# Allegro board CMS.brd
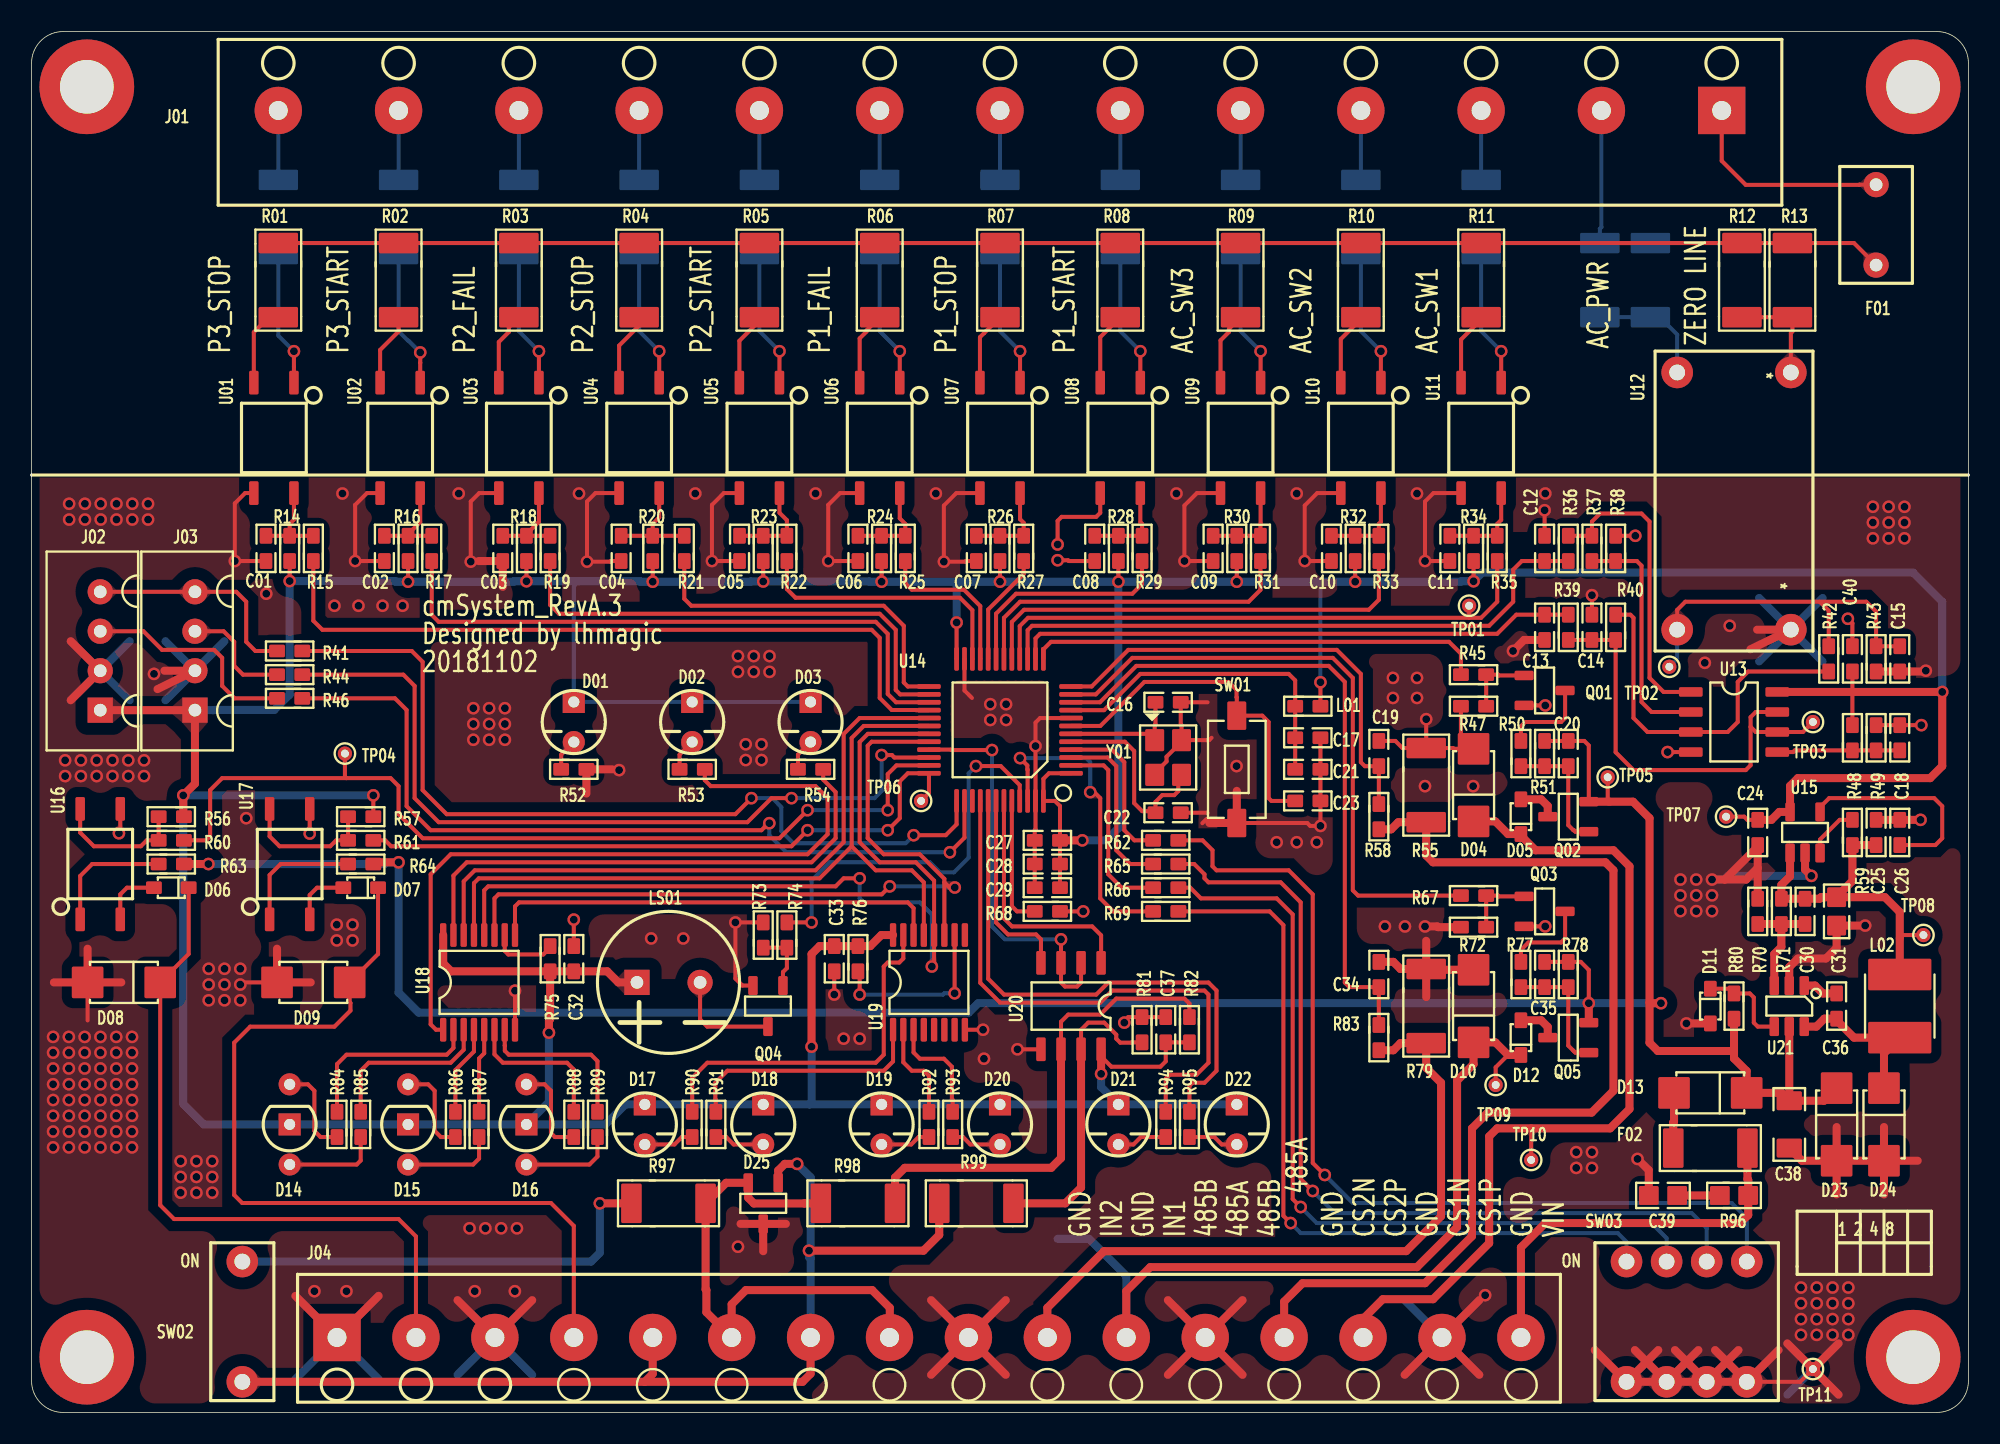
[diagram p0: board, top side]
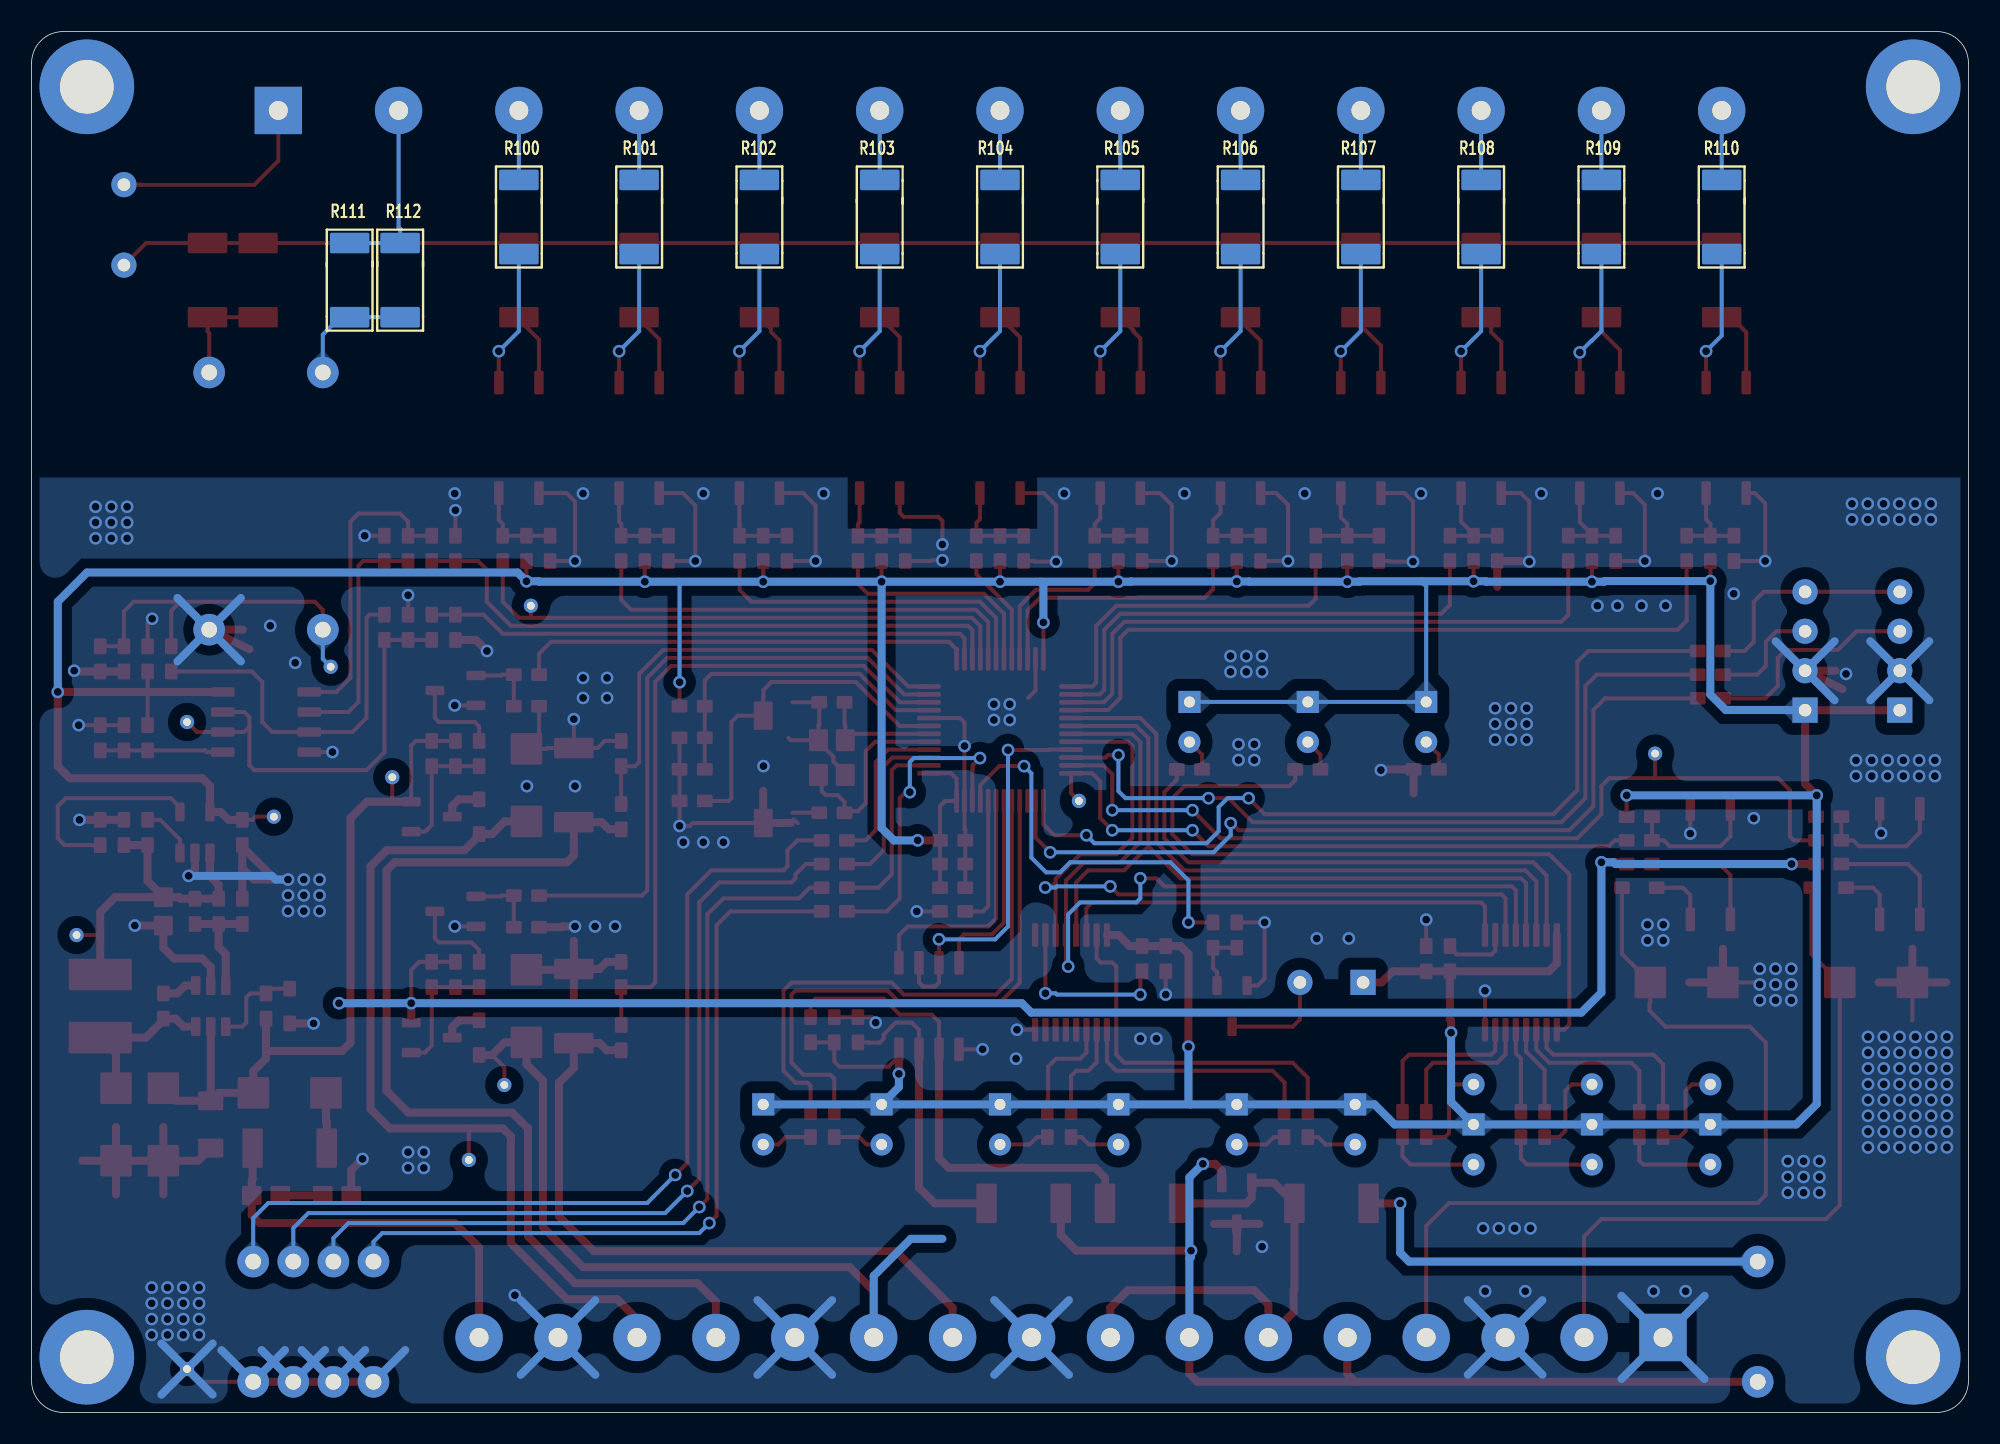
[diagram p1: board, bottom side, seen from below]

Outline 122.7 x 87.5 mm; copper layers: TOP, BOTTOM. Coordinates in mm from the lower left corner of the outline.
Outline path: 0,85.5 0,2 arc(0.59,0.59) 2,0 120.7,0 arc(122.11,0.59) 122.7,2 122.7,85.5 arc(122.11,86.91) 120.7,87.5 2,87.5 arc(0.59,86.91) 0,85.5

## Design rules (mm)
constraint set DEFAULT: min track width 0.254

## Placement (name value [footprint] x y rotation side)
C01  10uF  [C0603]  14.85 54.75 270 top
C02  10uF  [C0603]  22.35 54.75 270 top
C03  10uF  [C0603]  29.85 54.75 270 top
C04  10uF  [C0603]  37.35 54.75 270 top
C05  10uF  [C0603]  44.85 54.75 270 top
C06  10uF  [C0603]  52.35 54.75 270 top
C07  10uF  [C0603]  59.85 54.75 270 top
C08  10uF  [C0603]  67.35 54.75 270 top
C09  10uF  [C0603]  74.85 54.75 270 top
C10  10uF  [C0603]  82.35 54.75 270 top
C11  10uF  [C0603]  89.85 54.75 270 top
C12  0.1uF  [C0603]  95.85 54.75 90 top
C13  0.1uF  [C0603]  95.85 49.75 270 top
C14  2.2uF  [C0603]  98.85 49.75 90 top
C15  0.1uF  [C0603]  118.35 47.75 270 top
C16  6pF  [C0603]  72 45 0 top
C17  10nF  [C0603]  80.85 42.75 0 top
C18  0.1uF  [C0603]  118.35 42.75 90 top
C19  0.1uF  [C0603]  85.35 41.75 90 top
C20  0.1uF  [C0603]  97.35 41.75 270 top
C21  1uF  [C0603]  80.85 40.75 0 top
C22  6pF  [C0603]  72 38 0 top
C23  0.1uF  [C0603]  80.85 38.75 0 top
C24  2.2uF  [C0603]  109.35 36.75 270 top
C25  2.2uF  [C0603]  116.85 36.75 90 top
C26  22nF  [C0603]  118.35 36.75 90 top
C27  0.1uF  [C0603]  64.35 36.25 180 top
C28  0.1uF  [C0603]  64.35 34.75 180 top
C29  4.7uF  [C0603]  64.35 33.25 180 top
C30  33pF  [C0603]  112.35 31.75 270 top
C31  10uF/25V  [C0805]  114.35 31.75 270 top
C32  0.1uF  [C0603]  34.35 28.75 90 top
C33  0.1uF  [C0603]  50.85 28.75 270 top
C34  0.1uF  [C0603]  85.35 27.75 90 top
C35  0.1uF  [C0603]  95.85 27.75 270 top
C36  0.1uF  [C0603]  114.35 25.75 90 top
C37  0.1uF  [C0603]  71.85 24.25 90 top
C38  4.7uF/50V  [C1206]  111.35 18.25 90 top
C39  2.2uF/50V  [C0805]  103.35 13.75 180 top
C40  0.1uF  [C0603]  115.35 47.75 90 top
D01  GREEN  [LED-3MM]  34.35 43.75 270 top
D02  GREEN  [LED-3MM]  41.85 43.75 270 top
D03  YELLOW  [LED-3MM]  49.35 43.75 270 top
D04  SMAJ36CA  [SMA]  91.35 39.75 90 top
D05  1N4148WS  [SOD-323]  94.35 37.75 90 top
D06  1N4148WS  [SOD-323]  8.85 33.25 180 top
D07  1N4148WS  [SOD-323]  20.85 33.25 180 top
D08  SMAJ36CA  [SMA]  5.85 27.25 180 top
D09  SMAJ36CA  [SMA]  17.85 27.25 180 top
D10  SMAJ36CA  [SMA]  91.35 25.75 90 top
D11  MZT52C3V6S  [SOD-323]  106.35 25.75 270 top
D12  1N4148WS  [SOD-323]  94.35 23.75 90 top
D13  SS16  [SMA]  106.35 20.25 180 top
D14  LED_BI_CA  [LED-3MM-2]  16.35 18.25 270 top
D15  LED_BI_CA  [LED-3MM-2]  23.85 18.25 270 top
D16  LED_BI_CA  [LED-3MM-2]  31.35 18.25 270 top
D17  GREEN  [LED-3MM]  38.85 18.25 270 top
D18  GREEN  [LED-3MM]  46.35 18.25 270 top
D19  GREEN  [LED-3MM]  53.85 18.25 270 top
D20  GREEN  [LED-3MM]  61.35 18.25 270 top
D21  GREEN  [LED-3MM]  68.85 18.25 270 top
D22  GREEN  [LED-3MM]  76.35 18.25 270 top
D23  SMAJ36CA  [SMA]  114.35 18.25 270 top
D24  SS16  [SMA]  117.35 18.25 270 top
D25  PSM712  [SOT23-3]  46.35 13.25 90 top
F01  JK250-060  [PTC-5R1]  116.85 75.25 270 top
F02  MSMD050-60V  [R2010]  106.35 16.75 180 top
J01  AC220V SOCKET  [CON7R62MM-13P]  61.35 82.5 180 top
J02  DBG  [XH-4A]  4.35 48.25 90 top
J03  SWD  [XH-4A]  10.35 48.25 90 top
J04  Miscellaneous  [CON5MM-16P]  56.85 4.75 0 top
L01  CBG160808U600T  [R0603]  80.85 44.75 180 top
L02  SWPA4012S100MT  [INDC40]  118.35 25.75 90 top
LS01  -  [BZ09B]  40.35 27.25 0 top
NOREF  -  [unnamed]  3.5 3.5 0 top
NOREF#2  -  [unnamed]  119.2 84 0 top
NOREF#3  -  [#2]  0 0 0 top
NOREF#4  -  [#2]  0 0 90 top
NOREF#5  -  [unnamed]  3.5 84 0 top
NOREF#6  -  [unnamed]  119.2 3.5 0 top
Q01  2N7002K  [SOT23-3]  95.85 45.75 180 top
Q02  BSS84LT1G  [SOT23-3]  97.35 37.75 0 top
Q03  2N7002K  [SOT23-3]  95.85 31.75 180 top
Q04  2N7002K  [SOT23-3]  46.65 25.75 90 top
Q05  BSS84LT1G  [SOT23-3]  97.35 23.75 0 top
R01  221K  [R2010]  15.63 71.75 90 top
R02  221K  [R2010]  23.25 71.75 90 top
R03  221K  [R2010]  30.87 71.75 90 top
R04  221K  [R2010]  38.49 71.75 90 top
R05  221K  [R2010]  46.11 71.75 90 top
R06  221K  [R2010]  53.73 71.75 90 top
R07  221K  [R2010]  61.35 71.75 90 top
R08  221K  [R2010]  68.97 71.75 90 top
R09  221K  [R2010]  76.59 71.75 90 top
R10  221K  [R2010]  84.21 71.75 90 top
R11  221K  [R2010]  91.83 71.75 90 top
R12  221K  [R2010]  108.35 71.75 90 top
R13  221K  [R2010]  111.55 71.75 90 top
R14  12K  [R0603]  16.35 54.75 90 top
R15  1K  [R0603]  17.85 54.75 270 top
R16  12K  [R0603]  23.85 54.75 90 top
R17  1K  [R0603]  25.35 54.75 270 top
R18  12K  [R0603]  31.35 54.75 90 top
R19  1K  [R0603]  32.85 54.75 270 top
R20  12K  [R0603]  39.35 54.75 90 top
R21  1K  [R0603]  41.35 54.75 270 top
R22  12K  [R0603]  46.35 54.75 90 top
R23  1K  [R0603]  47.85 54.75 270 top
R24  12K  [R0603]  53.85 54.75 90 top
R25  1K  [R0603]  55.35 54.75 270 top
R26  12K  [R0603]  61.35 54.75 90 top
R27  1K  [R0603]  62.85 54.75 270 top
R28  12K  [R0603]  68.85 54.75 90 top
R29  1K  [R0603]  70.35 54.75 270 top
R30  12K  [R0603]  76.35 54.75 90 top
R31  1K  [R0603]  77.85 54.75 270 top
R32  12K  [R0603]  83.85 54.75 90 top
R33  1K  [R0603]  85.35 54.75 270 top
R34  12K  [R0603]  91.35 54.75 90 top
R35  1K  [R0603]  92.85 54.75 270 top
R36  1K  [R0603]  97.35 54.75 90 top
R37  27K  [R0603]  98.85 54.75 90 top
R38  3K  [R0603]  100.35 54.75 270 top
R39  1K  [R0603]  97.35 49.75 270 top
R40  27K  [R0603]  100.35 49.75 270 top
R41  100R  [R0603]  16.35 48.25 0 top
R42  3K  [R0603]  113.85 47.75 90 top
R43  51R  [R0603]  116.85 47.75 270 top
R44  100R  [R0603]  16.35 46.75 0 top
R45  1K  [R0603]  91.35 46.75 0 top
R46  100R  [R0603]  16.35 45.25 0 top
R47  10K  [R0603]  91.35 44.75 0 top
R48  10K  [R0603]  115.35 42.75 270 top
R49  10K  [R0603]  116.85 42.75 90 top
R50  100K  [R0603]  94.35 41.75 270 top
R51  100K  [R0603]  95.85 41.75 90 top
R52  1K  [R0603]  34.35 40.75 180 top
R53  1K  [R0603]  41.85 40.75 180 top
R54  1K  [R0603]  49.35 40.75 180 top
R55  100R  [R2010]  88.35 39.75 90 top
R56  30K  [R0603]  8.85 37.75 0 top
R57  30K  [R0603]  20.85 37.75 0 top
R58  1K  [R0603]  85.35 37.75 90 top
R59  10K  [R0603]  115.35 36.75 270 top
R60  1K  [R0603]  8.85 36.25 180 top
R61  1K  [R0603]  20.85 36.25 180 top
R62  1K  [R0603]  71.85 36.25 180 top
R63  20K  [R0603]  8.85 34.75 180 top
R64  20K  [R0603]  20.85 34.75 180 top
R65  1K  [R0603]  71.85 34.75 180 top
R66  1K  [R0603]  71.85 33.25 180 top
R67  1K  [R0603]  91.35 32.75 0 top
R68  10K  [R0603]  64.35 31.75 0 top
R69  1K  [R0603]  71.85 31.75 180 top
R70  20K  [R0603]  109.35 31.75 90 top
R71  100K  [R0603]  110.85 31.75 90 top
R72  10K  [R0603]  91.35 30.75 0 top
R73  10K  [R0603]  46.35 30.25 270 top
R74  1K  [R0603]  47.85 30.25 270 top
R75  10K  [R0603]  32.85 28.75 90 top
R76  10K  [R0603]  52.35 28.75 270 top
R77  100K  [R0603]  94.35 27.75 270 top
R78  100K  [R0603]  97.35 27.75 90 top
R79  100R  [R2010]  88.35 25.75 90 top
R80  510K  [R0603]  107.85 25.75 90 top
R81  NF  [R0603]  70.35 24.25 90 top
R82  NF  [R0603]  73.35 24.25 90 top
R83  1K  [R0603]  85.35 23.75 90 top
R84  1.2K  [R0603]  19.35 18.25 270 top
R85  820R  [R0603]  20.85 18.25 270 top
R86  1.2K  [R0603]  26.85 18.25 270 top
R87  820R  [R0603]  28.35 18.25 270 top
R88  1.2K  [R0603]  34.35 18.25 270 top
R89  820R  [R0603]  35.85 18.25 270 top
R90  1K  [R0603]  41.85 18.25 270 top
R91  1K  [R0603]  43.35 18.25 270 top
R92  1K  [R0603]  56.85 18.25 270 top
R93  1K  [R0603]  58.35 18.25 270 top
R94  1K  [R0603]  71.85 18.25 270 top
R95  1K  [R0603]  73.35 18.25 270 top
R96  2R  [R0805]  107.85 13.75 180 top
R97  120R  [R2010]  40.35 13.25 180 top
R98  22R  [R2010]  52.35 13.25 180 top
R99  22R  [R2010]  59.85 13.25 180 top
R100  221K  [R2010]  91.83 75.75 90 bottom
R101  221K  [R2010]  84.21 75.75 90 bottom
R102  221K  [R2010]  76.59 75.75 90 bottom
R103  221K  [R2010]  68.97 75.75 90 bottom
R104  221K  [R2010]  61.35 75.75 90 bottom
R105  221K  [R2010]  53.73 75.75 90 bottom
R106  221K  [R2010]  46.11 75.75 90 bottom
R107  221K  [R2010]  38.49 75.75 90 bottom
R108  221K  [R2010]  30.87 75.75 90 bottom
R109  221K  [R2010]  23.25 75.75 90 bottom
R110  221K  [R2010]  15.63 75.75 90 bottom
R111  221K  [R2010]  102.55 71.75 90 bottom
R112  221K  [R2010]  99.35 71.75 90 bottom
SW01  SW-PB-2  [SW-3X6]  76.35 40.75 270 top
SW02  SW SPST  [DIP-1X2]  13.35 5.75 0 top
SW03  SW DIP-4  [DIP-4X2]  104.85 5.75 0 top
TP01  TP  [TP1]  91.07 51.12 0 top
TP02  TP  [TP1]  103.75 47.25 0 top
TP03  TP  [TP1]  112.85 43.75 0 top
TP04  TP  [TP1]  19.85 41.75 0 top
TP05  TP  [TP1]  99.85 40.25 0 top
TP06  TP  [TP1]  56.35 38.75 0 top
TP07  TP  [TP1]  107.35 37.75 0 top
TP08  TP  [TP1]  119.85 30.25 0 top
TP09  TP  [TP1]  92.75 20.75 0 top
TP10  TP  [TP1]  95 16 0 top
TP11  TP  [TP1]  112.85 2.75 0 top
U01  EL354  [SOP-4]  15.35 61.75 270 top
U02  EL354  [SOP-4]  23.35 61.75 270 top
U03  EL354  [SOP-4]  30.87 61.75 270 top
U04  EL354  [SOP-4]  38.49 61.75 270 top
U05  EL354  [SOP-4]  46.11 61.75 270 top
U06  EL354  [SOP-4]  53.73 61.75 270 top
U07  EL354  [SOP-4]  61.35 61.75 270 top
U08  EL354  [SOP-4]  68.97 61.75 270 top
U09  EL354  [SOP-4]  76.59 61.75 270 top
U10  EL354  [SOP-4]  84.21 61.75 270 top
U11  EL354  [SOP-4]  91.83 61.75 270 top
U12  ZMPT107  [DIP-16R3X7R2]  107.85 57.75 270 top
U13  LMV358  [SOIC-8]  107.85 43.75 270 top
U14  STM32F030C8  [LQFP-48]  61.35 43.25 90 top
U15  RT9193-33GB  [SOT23-5]  112.35 36.75 270 top
U16  EL354  [SOP-4]  4.35 34.75 90 top
U17  EL354  [SOP-4]  16.35 34.75 90 top
U18  74HC595  [TSSOP-16]  28.35 27.25 0 top
U19  74HC595  [TSSOP-16]  56.85 27.25 0 top
U20  SP3485  [SOIC-8]  65.85 25.75 180 top
U21  MP2451  [SOT23-6]  111.35 25.75 90 top
Y01  12MHz  [SMD3225-4]  72 41.5 270 top

## Library data of the parts
C01 C02 C03 C04 C05 C06 C07 C08 C09-C23 C27-C29 C32-C35 C37 C40 = CAP NP
C24-C26 C30 C31 C36 C38 C39 = CAP NP: room: MP2451
D01 D02 D03 D17-D22 = LED
D04 D08 D09 D10 D23 = DIODE TVS
D05 D06 D07 D12 = DIODE
D11 = DIODE ZENER
D13 D24 = DIODE SCHOTTKY: room: MP2451
D14-D16 = LED_BI_CA
D25 = TVS_BD
F01 F02 = FUSE
J01 = CONN RECT 13
J02 J03 = CONN PCB 4
J04 = CONN SOCKET 16
L01 = INDUCTOR
L02 = INDUCTOR: room: MP2451
LS01 = BUZZER
Q01 Q03 Q04 = NMOS
Q02 Q05 = PMOS
R01 R02 R03 R04 R05 R06 R07 R08 R09-R58 R60-R69 R72-R79 R81-R95 R97-R112 = RES
R59 R70 R71 R80 R96 = RES: room: MP2451
SW01 = SW-PB-2
SW02 = SW SPST
SW03 = SW DIP-4
TP01 TP02 TP03 TP04 TP05 TP06 TP07 TP08 TP09-TP11 = TP
U01 U02 U03 U04 U05 U06 U07 U08 U09-U11 U16 U17 = EL354
U12 = ZMPT107
U13 = LM358
U14 = STM32F030C8
U15 = RT9193
U18 U19 = 74HC595
U20 = SP485
U21 = MP2451
Y01 = CRYSTAL-1

## Footprints (pads in the part's own frame, mm; a bottom-side part is the same pattern mirrored in y, then rotated)
BZ09B
  rect 1.6x1.6 hole 0.8: 1(-2,0)
  round 1.6 hole 0.8: 2(2,0)
C0603
  rrect 1x0.8 smd: 1(-0.8,0) 2(0.8,0)
C0805
  rrect 1.25x1.2 smd: 1(-0.9,0) 2(0.9,0)
C1206
  rrect 1.2x1.6 smd: 1(-1.5,0) 2(1.5,0)
CON5MM-16P
  rect 3x3 hole 1.2: 1(-37.5,0)
  round 3 hole 1.2: 2(-32.5,0) 3(-27.5,0) 4(-22.5,0) 5(-17.5,0) 6(-12.5,0) 7(-7.5,0) 8(-2.5,0) 9(2.5,0) 10(7.5,0) 11(12.5,0) 12(17.5,0) 13(22.5,0) 14(27.5,0) 15(32.5,0) 16(37.5,0)
CON7R62MM-13P
  rect 3x3 hole 1.2: 1(-45.72,0)
  round 3 hole 1.2: 2(-38.1,0) 3(-30.48,0) 4(-22.86,0) 5(-15.24,0) 6(-7.62,0) 7(0,0) 8(7.62,0) 9(15.24,0) 10(22.86,0) 11(30.48,0) 12(38.1,0) 13(45.72,0)
DIP-1X2
  round 2 hole 1: 1(0,3.81) 2(0,-3.81)
DIP-4X2
  round 2 hole 1: 1(-3.81,3.81) 2(-1.27,3.81) 3(1.27,3.81) 4(3.81,3.81) 5(-3.81,-3.81) 6(-1.27,-3.81) 7(1.27,-3.81) 8(3.81,-3.81)
DIP-16R3X7R2
  round 2 hole 1: 1(-8.15,3.6) 2(-8.15,-3.6) 3(8.15,3.6) 4(8.15,-3.6)
INDC40
  rrect 2x4 smd: 1(-2,0) 2(2,0)
LED-3MM
  rect 1.4x1.4 hole 0.7: 1(-1.27,0)
  round 1.4 hole 0.7: 2(1.27,0)
LED-3MM-2
  rect 1.4x1.4 hole 0.7: 1(0,0)
  round 1.4 hole 0.7: 2(-2.54,0) 3(2.54,0)
LQFP-48
  rrect 0.3x1.5 smd: 1(-2.75,-4.5) 2(-2.25,-4.5) 3(-1.75,-4.5) 4(-1.25,-4.5) 5(-0.75,-4.5) 6(-0.25,-4.5) 7(0.25,-4.5) 8(0.75,-4.5) 9(1.25,-4.5) 10(1.75,-4.5) 11(2.25,-4.5) 12(2.75,-4.5) 25(2.75,4.5) 26(2.25,4.5) 27(1.75,4.5) 28(1.25,4.5) 29(0.75,4.5) 30(0.25,4.5) 31(-0.25,4.5) 32(-0.75,4.5) 33(-1.25,4.5) 34(-1.75,4.5) 35(-2.25,4.5) 36(-2.75,4.5)
  rrect 1.5x0.3 smd: 13(4.5,-2.75) 14(4.5,-2.25) 15(4.5,-1.75) 16(4.5,-1.25) 17(4.5,-0.75) 18(4.5,-0.25) 19(4.5,0.25) 20(4.5,0.75) 21(4.5,1.25) 22(4.5,1.75) 23(4.5,2.25) 24(4.5,2.75) 37(-4.5,2.75) 38(-4.5,2.25) 39(-4.5,1.75) 40(-4.5,1.25) 41(-4.5,0.75) 42(-4.5,0.25) 43(-4.5,-0.25) 44(-4.5,-0.75) 45(-4.5,-1.25) 46(-4.5,-1.75) 47(-4.5,-2.25) 48(-4.5,-2.75)
PTC-5R1
  round 1.6 hole 0.8: 1(-2.55,0) 2(2.55,0)
R0603
  rrect 1x0.8 smd: 1(-0.8,0) 2(0.8,0)
R0805
  rrect 1.25x1.2 smd: 1(-0.9,0) 2(0.9,0)
R2010
  rrect 1.3x2.5 smd: 1(-2.35,0) 2(2.35,0)
SMA
  rrect 2x2 smd: 1(2.3,0) 2(-2.3,0)
SMD3225-4
  rrect 1.4x1.2 smd: 1(-1.1,-0.85) 2(1.1,-0.85) 3(1.1,0.85) 4(-1.1,0.85)
SOD-323
  rrect 1x0.8 smd: 1(1.1,0) 2(-1.1,0)
SOIC-8
  rrect 0.6x1.5 smd: 1(-1.905,-2.74) 2(-0.635,-2.74) 3(0.635,-2.74) 4(1.905,-2.74) 5(1.905,2.74) 6(0.635,2.74) 7(-0.635,2.74) 8(-1.905,2.74)
SOP-4
  rrect 1.5x0.6 smd: 1(-3.505,1.27) 2(-3.505,-1.27) 3(3.495,-1.27) 4(3.495,1.27)
SOT23-3
  rrect 1.2x0.6 smd: 1(1.3,-0.95) 2(1.3,0.95) 3(-1.3,0)
SOT23-5
  rrect 1.2x0.6 smd: 1(1.3,-0.95) 2(1.3,0) 3(1.3,0.95) 4(-1.3,0.95) 5(-1.3,-0.95)
SOT23-6
  rrect 1.2x0.6 smd: 1(1.3,-0.95) 2(1.3,0) 3(1.3,0.95) 4(-1.3,0.95) 5(-1.3,0) 6(-1.3,-0.95)
SW-3X6
  rrect 1.8x1.2 smd: 1(-3.4,0) 2(3.4,0)
TP1
  round 0.9 hole 0.5: 1(0,0)
TSSOP-16
  rrect 0.4x1.5 smd: 1(-2.275,-3) 2(-1.625,-3) 3(-0.975,-3) 4(-0.325,-3) 5(0.325,-3) 6(0.975,-3) 7(1.625,-3) 8(2.275,-3) 9(2.275,3) 10(1.625,3) 11(0.975,3) 12(0.325,3) 13(-0.325,3) 14(-0.975,3) 15(-1.625,3) 16(-2.275,3)
unnamed
  round 6 hole 3.4: (0,0)
XH-4A
  rect 1.6x1.6 hole 0.8: 1(-3.75,0)
  round 1.6 hole 0.8: 2(-1.25,0) 3(1.25,0) 4(3.75,0)

## Nets
+3V3: C24.1 C27.1 C28.1 C29.1 C32.1 C33.1 C37.1 C40.1 D01.1(CATHODE) D02.1(CATHODE) D03.1(CATHODE) D14.1 D15.1 D16.1 D17.1(CATHODE) D18.1(CATHODE) D19.1(CATHODE) D20.1(CATHODE) D21.1(CATHODE) D22.1(CATHODE) J02.1 J03.1 L01.1 LS01.1 R14.1 R16.1 R18.1 R20.1 R22.1 R24.1 R26.1 R28.1 R30.1 R32.1 R34.1 R48.1 R56.2 R57.2 R75.1 R76.1 R82.1 TP07.1 U13.8 U14.1 U14.24 U14.48 U15.5(VOUT) U18.16(VCC) U19.16(VCC) U20.8(VCC)
+5V: C25.1 C30.1 C31.1 L02.2 R59.2 R71.2 TP08.1 U15.1
+24V: C20.1 C35.1 C38.2 D13.2 D23.2(CATHODE) Q02.2(SOURCE) Q05.2(SOURCE) R51.2 R63.1 R64.1 R78.2 R80.1 TP05.1 U21.5(VIN)
GND: C01.2 C02.2 C03.2 C04.2 C05.2 C06.2 C07.2 C08.2 C09.2 C10.2 C11.2 C12.2 C13.2 C14.2 C15.2 C16.2 C17.2 C18.2 C19.2 C21.2 C22.2 C23.2 C24.2 C25.2 C26.2 C27.2 C28.2 C29.2 C31.2 C32.2 C33.2 C34.2 C37.2 C38.1 C39.2 C40.2 D04.1 D08.1 D09.1 D10.1 D11.1(CATHODE) D23.1 D24.1(CATHODE) D25.3 J02.2 J03.2 J04.1 J04.3 J04.9 J04.12 J04.15 Q01.2(SOURCE) Q03.2(SOURCE) Q04.2(SOURCE) R38.1 R43.2 R47.1 R49.2 R52.1 R55.2 R68.2 R70.2 R72.1 R73.1 R79.2 R81.2 SW01.2 SW03.5(B4) SW03.6 SW03.7 SW03.8 TP11.1 U01.3(EMITTER) U02.3(EMITTER) U03.3(EMITTER) U04.3(EMITTER) U05.3(EMITTER) U06.3(EMITTER) U07.3(EMITTER) U08.3(EMITTER) U09.3(EMITTER) U10.3(EMITTER) U11.3(EMITTER) U12.3 U13.4 U14.8 U14.23 U14.47 U15.2 U16.3(EMITTER) U17.3(EMITTER) U18.8 U19.8 U20.5 U21.2 Y01.2 Y01.4
GND_EARTH: F01.2 R01.2 R02.2 R03.2 R04.2 R05.2 R06.2 R07.2 R08.2 R09.2 R10.2 R11.2 R12.2 R13.2
VIN: F02.1 J04.16 R96.1
AC_PWR: J01.2 R111.2 R112.2
AC_SW1: J01.3 R100.2
AC_SW2: J01.4 R101.2
AC_SW3: J01.5 R102.2
AD_AC_PWR: C12.1 R36.1 U14.15
AD_CS1: C19.1 R58.2 U14.12
AD_CS2: C34.1 R83.2 U14.10
AD_VREF: C13.1 R39.1 U14.14
BEEPER: R74.1 U14.45
BOOT0: R68.1 U14.44
CS1_PWR: R45.1 U14.13
CS2_PWR: R67.1 U14.11
CURR_SENSE_N1: J04.13 R55.1 R58.1
CURR_SENSE_N2: J04.10 R79.1 R83.1
CURR_SENSE_P1: D04.2(CATHODE) D05.2 J04.14 TP10.1
CURR_SENSE_P2: D10.2(CATHODE) D12.2 J04.11 TP09.1
DBG_RX: R46.2 U14.38
DI_EXT_IN1: R61.1 TP06.1 U14.36
DI_EXT_IN2: R60.1 TP04.1 U14.35
DI_PUMP1_FAIL: R25.2 U14.21
DI_PUMP1_START: R29.2 U14.19
DI_PUMP1_STOP: R27.2 U14.20
DI_PUMP2_FAIL: R19.2 U14.26
DI_PUMP2_START: R23.2 U14.22
DI_PUMP2_STOP: R21.2 U14.25
DI_PUMP3_START: R17.2 U14.27
DI_PUMP3_STOP: R15.2 U14.28
DI_SW1: R35.2 TP01.1 U14.16
DI_SW2: R33.2 U14.17
DI_SW3: R31.2 U14.18
DIP_SW0: R62.2 U14.4
DIP_SW1: R65.2 U14.3
DIP_SW2: R66.2 U14.2
DIP_SW3: R69.2 U14.46(PB9)
EXT_IN1: D07.2 D09.2(CATHODE) J04.4
EXT_IN2: D06.2 D08.2(CATHODE) J04.2
LED_DS: U14.29 U18.14
LED_OE: U14.30 U18.13 U19.13
LED_SH: U14.32 U18.11 U19.11
LED_ST: U14.31 U18.12 U19.12
NRST: C23.1 SW01.1 U14.7
OSC_IN: C22.1 U14.5 Y01.3
OSC_OUT: C16.1 U14.6 Y01.1
PUMP1_FAIL: J01.8 R105.2
PUMP1_START: J01.6 R103.2
PUMP1_STOP: J01.7 R104.2
PUMP2_FAIL: J01.11 R108.2
PUMP2_START: J01.9 R106.2
PUMP2_STOP: J01.10 R107.2
PUMP3_START: J01.12 R109.2
PUMP3_STOP: J01.13 R110.2
RS485_RX_LED: R95.1 U14.41
RS485_TX_LED: R94.1 U14.40
RS485A: D25.2 J04.6 J04.8 R97.1 R98.2
RS485B: D25.1 J04.5 J04.7 R99.2 SW02.2
SWCLK: R41.2 U14.37
SWDIO: R44.2 U14.34
USART_DE: U14.33 U20.2 U20.3
USART_RX: U14.43 U20.1
USART_TX: U14.42 U20.4
VREF: C14.1 R39.2 R40.2 TP03.1 U13.6 U13.7(OUT)
N189166: C36.1 D24.2 L02.1 U21.6
N189308: C36.2 U21.1
N189348: C30.2 R70.1 R71.1 U21.3
N190496: D11.2 R80.2 U21.4
N190785: C39.1 R96.2
N193009: C26.1 U15.4
N410005: C17.1 C21.1 L01.2 U14.9
N444772: R36.2 R37.2 U13.1
N444804: R40.1 R42.1 U13.3
N444926: R111.1 R112.1 U12.2
N444930: C15.1 R42.2 R43.1 TP02.1 U12.4
N444978: R37.1 R38.2 U13.2
N445022: R12.1 R13.1 U12.1
N446190: C18.1 R48.2 R49.1 U13.5
N466592: D05.1(K) Q02.3
N466694: C20.2 Q02.1 R50.2 R51.1
N466940: Q01.3 R50.1
N466944: Q01.1 R45.2 R47.2
N526273: R82.2 R98.1 U20.6
N526379: R81.1 R99.1 U20.7
N537303: R59.1 U15.3
N543383: C11.1 R34.2 R35.1 U11.4
N543441: R100.1 U11.1
N546512: C10.1 R32.2 R33.1 U10.4
N546526: R101.1 U10.1
N546951: C09.1 R30.2 R31.1 U09.4
N546965: R102.1 U09.1
N548187: C08.1 R28.2 R29.1 U08.4
N548207: C07.1 R26.2 R27.1 U07.4
N548227: C06.1 R24.2 R25.1 U06.4
N548241: R103.1 U08.1
N548283: R104.1 U07.1
N548325: R105.1 U06.1
N553345: C05.1 R22.2 R23.1 U05.4
N553365: C04.1 R20.2 R21.1 U04.4
N553385: C03.1 R18.2 R19.1 U03.4
N553399: R106.1 U05.1
N553441: R107.1 U04.1
N553483: R108.1 U03.1
N554336: C02.1 R16.2 R17.1 U02.4
N554356: C01.1 R14.2 R15.1 U01.4
N554370: R109.1 U02.1
N554412: R110.1 U01.1
N556627: D12.1(K) Q05.3
N556667: C35.2 Q05.1 R77.2 R78.1
N556785: Q03.3 R77.1
N556865: Q03.1 R67.2 R72.2
N558367: R64.2 U17.1
N558391: R57.1 R61.2 U17.4
N558447: D07.1(K) U17.2
N558752: R63.2 U16.1
N558776: R56.1 R60.2 U16.4
N558832: D06.1(K) U16.2
N572741: D14.2 R84.2
N572745: D14.3(CATHODE_2) R85.2
N572749: D15.2 R86.2
N572753: D15.3(CATHODE_2) R87.2
N572757: D16.2 R88.2
N572761: D16.3(CATHODE_2) R89.2
N572801: D03.2 R54.2
N572805: D02.2 R53.2
N572923: R54.1 U18.15
N572959: R75.2 U18.10
N572963: R53.1 U18.1
N573001: R84.1 U18.2
N573039: R85.1 U18.3
N573077: R86.1 U18.4
N573107: R87.1 U18.5
N573147: R88.1 U18.6
N573179: R89.1 U18.7
N574717: D17.2 R90.2
N574721: D18.2 R91.2
N574829: R90.1 U19.15
N574865: R76.2 U19.10
N574869: R91.1 U19.1
N574907: R92.1 U19.2
N574927: D19.2 R92.2
N574945: R93.1 U19.3
N574965: D20.2 R93.2
N575311: U18.9 U19.14
N587939: R97.2 SW02.1
N591951: F01.1 J01.1
N594430: R62.1 SW03.4
N594480: R65.1 SW03.3
N594586: R66.1 SW03.2
N594620: J03.3 R44.1
N594654: J02.3 R46.1
N594672: R69.1 SW03.1
N594682: J02.4 J03.4 R41.1
N600007: D01.2 R52.2
N600063: D22.2 R95.2
N600117: D21.2 R94.2
N601770: LS01.2(B) Q04.3
N601826: Q04.1 R73.2 R74.2
N618276: R11.1 U11.2
N618412: R10.1 U10.2
N618570: R09.1 U09.2
N618702: R08.1 U08.2
N618862: R07.1 U07.2
N618996: R06.1 U06.2
N619132: R05.1 U05.2
N619280: R04.1 U04.2
N619410: R03.1 U03.2
N619552: R02.1 U02.2
N619660: R01.1 U01.2
N1899351: D13.1(CATHODE) F02.2

Pads without a net: U14 39; U19 4 5 6 7 9

## Via types
v1: diameter 0.8, hole 0.5, TOP to BOTTOM, 307 vias

## Routing (per net, layer and track width the routed paths; a pad name or vN(x,y) marks a point on that pad's centre or on a via; arc(x,y) is an arc through that point)
+3V3: length 405.3
  TOP w0.254: R57.2 v1(21.65,39.1) ; C24.1 108.7,37.55 108.5,37.75 TP07.1 ; 53.83,30.25 53.7,30.25 53,29.55 ; R22.1 v1(46.35,52.65) ; R28.1 v1(68.85,52.64) ; R32.1 v1(83.85,52.64) ; 67.76,22.56 68.41,21.91 71.51,21.91 71.85,22.25 C37.1 R82.1 ; R18.1 v1(31.35,52.67) ; R26.1 v1(61.35,52.64) ; R48.1 115.35,45.55 115.45,45.66 115.35,45.76 C40.1 ; C29.1 C28.1 C27.1 65.15,38.43 64.83,38.75 U14.48 64.1,40.15 64.45,40.5 U14.1 ; U14.24 v1(58.6,50.06) ; R14.1 v1(16.35,52.68) ; R30.1 v1(76.35,52.64) ; L01.1 v1(81.65,46.27) ; R34.1 v1(91.35,52.67) ; R20.1 v1(39.35,52.64) ; R24.1 v1(53.85,52.64) ; R16.1 v1(23.85,52.64)
  TOP w0.508: R75.1 26.58,27.95 26.08,28.46 U18.16 ; R75.1 32.85,24.92 32.77,24.85 v1(32.77,24.07) ; R75.1 C32.1 36.47,27.95 37.17,27.25 LS01.1 ; C27.1 v1(66.56,36.25) ; U19.16 53.83,30.25 53.13,29.55 R76.1 C33.1 49.92,29.55 49.41,29.04 v1(49.41,23.18) ; U13.8 v1(121.04,45.66) 121.04,40.96 120.28,40.19 111.9,40.19 111.4,39.7 U15.5 110.72,38.05 110.22,37.55 C24.1 ; v1(67.76,21.45) U20.8 ; R56.2 9.61,37.79 v1(9.61,39.1) 10.35,39.84 J03.1 J02.1
  BOTTOM w0.254: 34.68,52.67 34.35,52.34 D01.1 D02.1 D03.1 ; 81.67,52.64 81.65,52.62 v1(81.65,46.27)
  BOTTOM w0.508: 49.28,19.52 49.41,19.65 v1(49.41,23.18) ; 49.28,19.52 D19.1 D20.1 D21.1 ; 49.28,19.52 D18.1 D17.1 37.63,19.52 36.36,18.25 D16.1 ; v1(66.56,36.25) 68.07,36.25 68.85,37.03 v1(68.85,52.64) ; 58.81,52.64 v1(61.35,52.64) v1(68.85,52.64) ; 58.81,52.64 v1(53.85,52.64) 53.07,52.64 53.06,52.65 v1(46.35,52.65) 45.57,52.65 45.56,52.64 v1(39.35,52.64) 38.57,52.64 38.54,52.67 v1(31.35,52.67) 30.57,52.67 30.54,52.64 v1(23.85,52.64) 23.07,52.64 23.03,52.68 v1(16.35,52.68) 16.35,45.49 15.38,44.51 11.54,44.51 11.53,44.5 J03.1 ; 58.81,52.64 58.6,52.43 v1(58.6,50.06) ; D16.1 D15.1 D14.1 10.9,18.25 9.61,19.54 v1(9.61,39.1) v1(21.65,39.1) ; D16.1 32.77,19.67 v1(32.77,24.07) ; v1(121.04,45.66) 121.04,51.37 119.19,53.22 91.9,53.22 v1(91.35,52.67) 90.57,52.67 90.54,52.64 v1(83.85,52.64) v1(76.35,52.64) v1(68.85,52.64) ; v1(67.76,21.45) 67.76,20.61 D21.1 ; D21.1 D22.1
+5V: length 21.8
  TOP w0.254: TP08.1 118.57,30.25 118.35,30.03
  TOP w0.508: C31.1 114.35,32.67 115.35,33.67 R59.2 C25.1 ; C31.1 113.37,32.65 113.27,32.55 C30.1 R71.2 110.85,33.43 111.4,33.98 U15.1 ; C31.1 117.41,32.65 118.35,31.71 L02.2
+24V: length 159.5
  TOP w0.254: 99.96,38.7 99.85,38.81 TP05.1 ; C35.1 R78.2 98.14,28.55 98.65,28.04 v1(98.65,25.93) ; Q02.2 98.65,42.26 98.36,42.55 C20.1 R51.2
  TOP w0.508: v1(103.22,25.93) 102.54,25.93 102.5,25.97 ; 107.85,22.9 103.02,22.9 102.5,23.43 102.5,25.97 ; 107.85,22.9 R80.1 ; 107.85,22.9 107.85,22.43 108.65,21.63 D13.2 110.85,20.25 C38.2 ; v1(23.25,34.86) 21.76,34.86 R64.1 ; Q05.2 v1(98.65,25.93) ; 102.5,25.97 102.5,37.65 101.45,38.7 Q02.2 ; D23.2 113.55,19.75 C38.2 ; R63.1 v1(11.2,34.75) ; U21.5 C38.2
  BOTTOM w0.508: v1(11.2,34.75) 22.36,34.75 22.47,34.86 v1(23.25,34.86) 23.25,26.61 24.52,25.34 59.37,25.34 59.97,25.93 v1(98.65,25.93) v1(103.22,25.93)
GND: length 503.3
  TOP w0.254: U08.3 67.7,57 67.45,56.75 65.25,56.75 65,56.5 v1(65,55) ; C17.2 C21.2 C23.2 v1(81.65,37.17) 81,37.17 80.81,37.35 SW01.2 ; U05.3 43.85,58.26 43.1,57.51 v1(43.1,53.95) C05.2 ; U17.3 v1(17.62,36.68) ; C32.2 v1(34.35,31.23) ; C40.2 115.35,50 v1(115.06,50.29) ; R49.2 C18.2 v1(119.72,43.55) ; v1(65,54) 65.66,54 65.71,53.95 C08.2 ; Y01.4 74.6,42.6 74.75,42.75 ; Y01.4 72.85,43.55 72.8,43.6 C16.2 74.5,45 ; Y01.4 72.85,42.5 71.9,41.55 71.9,41.25 71.15,40.5 Y01.2 ; R55.2 90.05,42.1 90.1,42.05 D04.1 90.55,42.85 R47.1 ; R55.2 v1(88.35,43.93) ; R55.2 86.85,42.1 86.4,42.55 C19.2 ; 59.57,45.27 59.1,45.75 U14.23 ; U18.8 v1(30.63,26.72) ; Q03.2 v1(95.89,30.8) ; C33.2 v1(50.85,26.48) ; U11.3 88.81,58.26 88.27,57.72 v1(88.27,53.95) C11.2 ; v1(69.22,24.7) 69.22,24.8 69.48,25.05 R81.2 C37.2 ; D09.1 13.35,27.25 ; C01.2 v1(12.88,53.95) 12.88,57.6 13.53,58.26 U01.3 ; U16.3 5.62,36.79 v1(5.53,36.7) ; C10.2 v1(80.65,53.95) 80.65,57.47 81.44,58.26 U10.3 ; C06.2 v1(50.47,53.95) 50.47,57.51 51.22,58.26 U06.3 ; D08.1 3.55,24.84 ; U13.4 v1(103.64,41.85) ; R73.1 v1(44.59,31.05) 44.59,27.49 45.03,27.05 Q04.2 ; U14.8 63.89,44 63.6,43.71 v1(63.6,42.23) U14.47 63.6,36.95 63.55,36.9 C27.2 C28.2 C29.2 ; 29.16,53.91 v1(27.82,53.91) 27.82,57.72 28.36,58.26 U03.3 ; C22.2 74.5,38 ; R68.2 v1(66.62,31.75) ; U02.3 21.24,58.26 20.5,57.51 v1(20.5,53.95) C02.2 ; TP11.1 112.04,1.94 SW03.8 ; C12.2 v1(95.85,57.17) ; C14.2 v1(98.85,51.79) ; U19.8 v1(60.28,24.25) ; C04.2 36.7,53.95 36.66,53.91 v1(35.19,53.91) 35.19,57.72 35.72,58.26 U04.3 ; U09.3 73.82,58.26 73.03,57.47 v1(73.03,53.95) C09.2 ; U20.5 v1(62.45,23.01) ; 74.17,37.34 74.42,37.59 ; R38.1 v1(101.6,55.55) ; U07.3 58.58,58.26 57.79,57.47 v1(57.79,53.91) 59.16,53.91 59.2,53.95 C07.2 ; Q01.2 v1(95.89,44.8)
  TOP w0.508: 36.79,40.75 R52.1 35.15,39.21 ; 99.03,3.95 SW03.5 ; SW03.5 103.05,3.95 ; SW03.5 SW03.6 ; 71.99,2.39 J04.12 ; J04.12 76.71,2.39 ; J04.12 71.99,7.11 ; J04.12 76.71,7.11 ; J04.15 91.71,7.11 ; J04.15 86.99,2.39 ; J04.15 91.71,2.39 ; 2.48,45.13 J02.2 2.48,48.87 ; 8.41,47 J03.2 7.98,45.84 ; U21.2 111.35,28.22 111.9,28.76 113.67,28.76 114.35,29.44 C31.2 v1(116.16,30.85) ; 26.99,7.11 J04.3 31.71,7.11 ; 106.65,3.95 SW03.8 ; SW03.8 110.67,3.95 ; SW03.8 SW03.7 ; SW03.6 105.59,3.95 ; SW03.6 101.57,3.95 ; SW03.6 SW03.7 ; 56.99,7.11 J04.9 ; J04.9 56.99,2.39 ; J04.9 61.71,7.11 ; J04.9 61.71,2.39 ; 21.99,7.39 J04.1 16.71,7.39 ; SW03.7 108.13,3.95 ; SW03.7 104.11,3.95 ; 107.27,33.77 109.35,35.85 ; 107.27,33.77 108.62,33.77 109.35,34.5 ; 107.27,33.77 v1(106.46,33.77) ; 109.35,35.85 109.35,34.5 ; 109.35,35.85 C24.2 ; 109.31,49.6 U12.3 108.89,48.36 ; C38.1 112.15,15.95 D23.1 ; 111.23,4.37 TP11.1 ; TP11.1 114.47,1.13 ; TP11.1 114.47,4.37 ; R79.2 86.72,28.1 86.27,28.55 C34.2 ; R79.2 88.35,26.31 ; R79.2 88.4,28.05 D10.1 ; R79.2 88.35,29.89 ; 44.91,11.95 D25.3 ; D25.3 46.35,10.21 ; D25.3 47.79,11.95 ; v1(119.67,37.55) C26.2 C25.2 ; 29.85,52.31 C03.2 28.31,53.95 ; D08.1 5.69,27.25 ; D08.1 3.55,29.39 ; D08.1 1.41,27.25 ; 109.35,34.5 R70.2 ; R43.2 C15.2 119.95,46.95 v1(120,47) ; C13.2 94.55,48.95 v1(93.85,48.25) ; D24.1 D23.1 ; D24.1 117.35,13.81 ; D24.1 119.49,15.95 ; D24.1 117.35,18.09 ; D23.1 114.35,18.09 ; D23.1 114.35,13.81 ; 76.35,39.39 SW01.2 74.61,37.35 ; U15.2 112.35,34.4 v1(112.75,34) ; v1(88.27,30.8) 89.05,30.8 89.1,30.75 R72.1 ; 17.69,27.25 D09.1 15.55,29.39 ; v1(101.74,16.06) 102.45,15.35 C39.2 ; D11.1 v1(104.83,24.65)
  BOTTOM w0.508: J03.2 12.22,48.87 ; J03.2 8.48,45.13 ; J03.2 8.48,48.87 ; 104.11,3.95 SW03.7 108.13,3.95 ; 101.57,3.95 SW03.6 105.59,3.95 ; v1(106.46,33.77) 107.24,33.77 107.47,34 v1(112.75,34) ; J04.15 91.71,2.39 ; J04.15 91.71,7.11 ; J04.15 86.99,7.11 ; J04.15 86.99,2.39 ; U12.3 113.46,51.61 ; U12.3 109.44,51.61 ; U12.3 109.44,47.59 ; U12.3 113.46,47.59 ; 2.48,48.87 J02.2 ; J02.2 6.22,45.13 ; J02.2 2.48,45.13 ; J02.2 6.22,48.87 ; J04.9 61.71,2.39 ; J04.9 56.99,7.11 ; J04.9 61.71,7.11 ; J04.9 56.99,2.39 ; 16.71,7.39 J04.1 ; J04.1 16.71,2.11 ; J04.1 21.99,2.11 ; J04.1 21.99,7.39 ; 111.23,4.37 TP11.1 ; TP11.1 114.47,4.37 ; TP11.1 111.23,1.13 ; TP11.1 114.47,1.13 ; 110.67,3.95 SW03.8 106.65,3.95 ; J04.3 31.71,2.39 ; J04.3 26.99,7.11 ; J04.3 26.99,2.39 ; J04.3 31.71,7.11 ; J04.12 76.71,2.39 ; J04.12 76.71,7.11 ; J04.12 71.99,7.11 ; J04.12 71.99,2.39 ; 99.03,3.95 SW03.5 103.05,3.95
  vias: v1(1.36,23.8) v1(1.36,22.8) v1(1.36,21.8) v1(1.36,20.8) v1(1.36,19.8) v1(1.36,18.8) v1(1.36,17.8) v1(1.36,16.8) v1(2.13,41.32) v1(2.13,40.32) v1(2.38,57.58) v1(2.38,56.58) v1(2.36,23.8) v1(2.36,22.8) v1(2.36,21.8) v1(2.36,20.8) v1(2.36,19.8) v1(2.36,18.8) v1(2.36,17.8) v1(2.36,16.8) v1(3.13,41.32) v1(3.13,40.32) v1(3.38,57.58) v1(3.38,56.58) v1(3.36,23.8) v1(3.36,22.8) v1(3.36,21.8) v1(3.36,20.8) v1(3.36,19.8) v1(3.36,18.8) v1(3.36,17.8) v1(3.36,16.8) v1(4.13,41.32) v1(4.13,40.32) v1(4.38,57.58) v1(4.38,56.58) v1(4.36,23.8) v1(4.36,22.8) v1(4.36,21.8) v1(4.36,20.8) v1(4.36,19.8) v1(4.36,18.8) v1(4.36,17.8) v1(4.36,16.8) v1(5.13,41.32) v1(5.13,40.32) v1(5.38,57.58) v1(5.38,56.58) v1(5.36,23.8) v1(5.36,22.8) v1(5.36,21.8) v1(5.36,20.8) v1(5.36,19.8) v1(5.36,18.8) v1(5.36,17.8) v1(5.36,16.8) v1(6.13,41.32) v1(6.13,40.32) v1(6.38,57.58) v1(6.38,56.58) v1(6.36,23.8) v1(6.36,22.8) v1(6.36,21.8) v1(6.36,20.8) v1(6.36,19.8) v1(6.36,18.8) v1(6.36,17.8) v1(6.36,16.8) v1(7.13,41.32) v1(7.13,40.32) v1(7.38,57.58) v1(7.38,56.58) v1(7.76,46.8) v1(9.44,15.92) v1(9.44,14.92) v1(9.44,13.92) v1(10.44,15.92) v1(10.44,14.92) v1(10.44,13.92) v1(11.22,28.11) v1(11.22,27.11) v1(11.22,26.11) v1(11.44,15.92) v1(11.44,14.92) v1(11.44,13.92) v1(12.22,28.11) v1(12.22,27.11) v1(12.22,26.11) v1(13.22,28.11) v1(13.22,27.11) v1(13.22,26.11) v1(13.6,37.65) v1(14.87,51.88) v1(17.92,7.68) v1(19.19,51.12) v1(19.33,30.91) v1(19.33,29.91) v1(19.69,58.23) v1(19.95,7.68) v1(20.33,30.91) v1(20.33,29.91) v1(20.71,51.12) v1(22.23,51.12) v1(23.5,51.12) v1(27.06,58.23) v1(27.75,11.67) v1(27.99,44.62) v1(27.99,43.62) v1(27.99,42.62) v1(28.08,7.68) v1(28.75,11.67) v1(28.99,44.62) v1(28.99,43.62) v1(28.99,42.62) v1(29.75,11.67) v1(29.99,44.62) v1(29.99,43.62) v1(29.99,42.62) v1(30.62,7.68) v1(30.75,11.67) v1(34.68,58.23) v1(37.22,40.7) v1(39.25,30.03) v1(41.28,30.03) v1(42.05,58.23) v1(44.75,47.93) v1(44.75,46.93) v1(44.75,10.5) v1(45.24,42.34) v1(45.24,41.34) v1(45.75,47.93) v1(45.75,46.93) v1(46.24,42.34) v1(46.24,41.34) v1(46.75,47.93) v1(46.75,46.93) v1(49.67,58.23) v1(51.44,23.68) v1(52.46,23.68) v1(57.29,58.23) v1(60.33,22.41) v1(60.74,44.88) v1(60.74,43.88) v1(61.74,44.88) v1(61.74,43.88) v1(72.53,58.23) v1(76.34,40.96) v1(78.88,36.13) v1(80.15,58.23) v1(80.15,36.13) v1(81.42,36.13) v1(85.73,30.8) v1(86.24,46.54) v1(86.24,45.27) v1(87,30.8) v1(87.77,58.23) v1(87.77,46.54) v1(87.77,45.27) v1(88.27,39.69) v1(91.32,39.69) v1(92.08,7.43) v1(95.89,58.23) v1(97.85,16.49) v1(97.85,15.49) v1(98.85,16.49) v1(98.85,15.49) v1(104.46,33.77) v1(104.46,32.77) v1(104.46,31.77) v1(105.46,33.77) v1(105.46,32.77) v1(105.46,31.77) v1(106,47.5) v1(106.46,32.77) v1(106.46,31.77) v1(107.58,49.85) v1(112.09,7.91) v1(112.09,6.91) v1(112.09,5.91) v1(112.09,4.91) v1(113.09,7.91) v1(113.09,6.91) v1(113.09,5.91) v1(113.09,4.91) v1(114.09,7.91) v1(114.09,6.91) v1(114.09,5.91) v1(114.09,4.91) v1(115.09,7.91) v1(115.09,6.91) v1(115.09,5.91) v1(115.09,4.91) v1(116.65,57.39) v1(116.65,56.39) v1(116.65,55.39) v1(117.65,57.39) v1(117.65,56.39) v1(117.65,55.39) v1(118.65,57.39) v1(118.65,56.39) v1(118.65,55.39)
GND_EARTH: length 101.8
  TOP w0.254: R01.2 R02.2 R03.2 R04.2 R05.2 R06.2 R07.2 R08.2 R09.2 R10.2 R11.2 R12.2 R13.2 115.45,74.1 F01.2
VIN: length 25.2
  TOP w0.508: J04.16 94.35,10.46 95.89,12 108.24,12 108.75,12.51 R96.1 108.75,14.73 108.7,14.78 F02.1
AC_PWR: length 11.6
  BOTTOM w0.254: R111.2 R112.2 99.35,75 99.45,75.1 J01.2
AC_SW1: length 4.4
  BOTTOM w0.254: J01.3 R100.2
AC_SW2: length 4.4
  BOTTOM w0.254: J01.4 R101.2
AC_SW3: length 4.4
  BOTTOM w0.254: J01.5 R102.2
AD_AC_PWR: length 39.1
  TOP w0.254: U14.15 63.1,49.56 63.38,49.85 92.34,49.85 93.86,51.37 93.86,53.4 94.41,53.95 C12.1 R36.1
AD_CS1: length 29.2
  TOP w0.254: U14.12 67.16,46 69.48,48.32 82.69,48.32 84.21,46.8 84.21,41.2 84.46,40.95 C19.1 R58.2
AD_CS2: length 42.4
  TOP w0.254: U14.10 67.68,45 69.99,47.31 82.18,47.31 83.19,46.29 83.19,27.24 83.48,26.95 C34.1 R83.2
AD_VREF: length 35.7
  TOP w0.254: U14.14 63.6,49.05 63.89,49.34 92.85,49.34 94.06,50.55 C13.1 R39.1
BEEPER: length 25.6
  TOP w0.254: U14.45 62.6,39.75 61.4,40.96 v1(59.83,40.96) ; R74.1 v1(49.41,31.05)
  BOTTOM w0.254: v1(59.83,40.96) 59.36,40.49 59.36,35.16 58.43,34.23 57.54,34.23 56.9,34.86 50.55,34.86 49.41,33.72 v1(49.41,31.05)
BOOT0: length 8.3
  TOP w0.254: R68.1 62.43,31.75 62.1,32.08 U14.44
CS1_PWR: length 28.9
  TOP w0.254: R45.1 90.55,48.08 89.8,48.83 64.58,48.83 64.1,48.35 U14.13
CS2_PWR: length 39.8
  TOP w0.254: R67.1 84.03,32.75 83.7,33.08 83.7,46.54 82.43,47.81 69.73,47.81 67.42,45.5 U14.11
CURR_SENSE_N1: length 64.2
  TOP w0.508: R58.1 86.13,36.95 86.58,37.4 R55.1 88.35,35.29 88.78,34.86 99.7,34.86 100.21,34.35 100.21,20.38 98.83,19 92.25,19 91.25,18 91.25,11.17 88.27,8.19 80.52,8.19 79.35,7.02 J04.13
CURR_SENSE_N2: length 43.8
  TOP w0.508: J04.10 64.35,6.63 67.94,10.22 87.08,10.22 89.29,12.43 89.29,20.89 88.35,21.83 R79.1 86.72,23.4 86.27,22.95 R83.1
CURR_SENSE_P1: length 56
  TOP w0.254: TP10.1 95,18
  TOP w0.508: J04.14 84.35,5.93 85.6,7.17 88.78,7.17 92.34,10.73 92.34,17.49 92.85,18 100,18 101.23,19.23 101.23,34.61 100.21,35.62 95.28,35.62 94.35,36.55 D05.2 93.53,36.65 92.73,37.45 D04.2
CURR_SENSE_P2: length 52.5
  TOP w0.254: TP09.1 92.75,21.87 93.53,22.65
  TOP w0.508: J04.11 69.35,7.69 70.87,9.21 87.77,9.21 90.31,11.75 90.31,21.03 91.35,22.07 D10.2 92.73,23.45 93.53,22.65 D12.2
  BOTTOM w0.508: J04.11 69.35,8.65 67,11 65,11
DBG_RX: length 53.1
  TOP w0.254: R46.2 23.02,45.25 23.76,44.51 23.76,38.42 25.28,36.89 46.24,36.89 46.47,37.13 46.53,37.13 v1(46.74,37.34) ; U14.38 59.1,36.42 v1(58.17,35.5)
  BOTTOM w0.254: v1(58.17,35.5) 47.82,35.5 46.74,36.58 v1(46.74,37.34)
DI_EXT_IN1: length 40.6
  TOP w0.254: R61.1 22.4,36.25 22.78,35.88 48.14,35.88 v1(49.16,36.89) ; TP06.1 56.85,39.25 U14.36 55.51,40.5 55,39.99 55,37.65 v1(54.24,36.89)
  BOTTOM w0.254: v1(49.16,36.89) v1(54.24,36.89)
DI_EXT_IN2: length 58
  TOP w0.254: U14.35 54.79,41 54.24,40.45 v1(54.24,38.16) ; TP04.1 19.85,40.29 19.95,40.19 ; R60.1 11.06,36.25 11.31,36.5 11.31,39.43 12.07,40.19 19.95,40.19 ; 19.95,40.19 22.74,40.19 23.25,39.69 23.25,37.91 24.77,36.38 47.38,36.38 v1(49.16,38.16)
  BOTTOM w0.254: v1(49.16,38.16) v1(54.24,38.16)
DI_PUMP1_FAIL: length 10.1
  TOP w0.254: U14.21 60.1,51.1 59.06,52.13 55.76,52.13 55.35,52.54 R25.2
DI_PUMP1_START: length 14.3
  TOP w0.254: U14.19 61.1,50.61 62.37,51.88 69.73,51.88 70.35,52.5 R29.2
DI_PUMP1_STOP: length 7.1
  TOP w0.254: U14.20 60.6,50.87 62.85,53.12 R27.2
DI_PUMP2_FAIL: length 31.4
  TOP w0.254: U14.26 55.03,45.5 54.75,45.78 54.75,49.59 53.73,50.61 33.41,50.61 32.85,51.17 R19.2
DI_PUMP2_START: length 17.2
  TOP w0.254: R23.2 47.85,52.17 48.4,51.62 58.81,51.62 59.6,50.83 U14.22
DI_PUMP2_STOP: length 22.3
  TOP w0.254: R21.2 41.35,51.56 41.79,51.12 53.98,51.12 55.25,49.85 55.25,46.25 55.51,46 U14.25
DI_PUMP3_START: length 39.4
  TOP w0.254: U14.27 54.77,45 54.24,45.53 54.24,49.34 53.48,50.1 25.79,50.1 25.35,50.54 R17.2
DI_PUMP3_STOP: length 47.4
  TOP w0.254: R15.2 17.85,50.17 18.42,49.59 53.22,49.59 53.73,49.08 53.73,45.27 54.49,44.51 56.02,44.51 56.03,44.5 U14.28
DI_SW1: length 36.3
  TOP w0.254: TP01.1 91.07,50.35 ; 91.07,50.35 63.13,50.35 62.6,49.83 U14.16 ; 91.07,50.35 91.83,50.35 92.85,51.37 R35.2
DI_SW2: length 28.6
  TOP w0.254: U14.17 62.1,50.09 62.87,50.86 84.72,50.86 85.35,51.49 R33.2
DI_SW3: length 21.4
  TOP w0.254: R31.2 77.85,52.12 77.1,51.37 62.62,51.37 61.6,50.35 U14.18
DIP_SW0: length 10.1
  TOP w0.254: U14.4 68.43,42 69.22,41.21 69.22,36.89 69.87,36.25 R62.2
DIP_SW1: length 11.1
  TOP w0.254: R65.2 69.59,34.75 68.72,35.62 68.72,40.96 68.17,41.5 U14.3
DIP_SW2: length 12.3
  TOP w0.254: U14.2 67.91,41 68.21,40.7 68.21,34.1 69.06,33.25 R66.2
DIP_SW3: length 20.2
  TOP w0.254: U14.46 63.1,40.73 63.08,40.75 63.08,41 v1(62.62,41.46) ; R69.2 68.52,31.75 67.7,32.57 67.7,38.92 67.32,39.31 v1(67.06,39.31)
  BOTTOM w0.254: v1(62.62,41.46) 66.81,41.46 67.06,41.21 v1(67.06,39.31)
EXT_IN1: length 55.8
  TOP w0.254: D07.2 21.95,29.05 D09.2 20.15,26 20.2,25.94 20.2,25.46 19.19,24.45 13.85,24.45 12.84,23.43 12.84,13.78 13.34,13.27 32.9,13.27 34.35,11.82 J04.4
EXT_IN2: length 44.3
  TOP w0.254: D06.2 9.95,29.05 D08.2 8.15,13.13 9.03,12.25 23.25,12.25 24.35,11.15 J04.2
LED_DS: length 41.2
  TOP w0.254: U18.14 27.38,33.65 28.08,34.35 49.67,34.35 51.44,36.13 51.44,42.99 52.46,44 U14.29
LED_OE: length 49.1
  TOP w0.254: 51.95,35.88 51.95,42.73 52.72,43.5 U14.30 ; 51.95,35.88 53.48,34.35 55.76,34.35 56.53,33.59 U19.13 ; 51.95,35.88 49.92,33.84 28.33,33.84 28.02,33.54 28.02,30.25 U18.13
LED_SH: length 52
  TOP w0.254: U18.11 29.33,32.57 29.58,32.83 53.86,32.83 v1(54.36,33.34) ; 57.83,33.59 57.83,33.81 56.27,35.37 53.98,35.37 52.97,36.38 52.97,42.25 53.22,42.5 U14.32 ; 57.83,33.59 U19.11 ; 57.83,33.59 58.15,33.26 v1(58.48,33.26)
  BOTTOM w0.254: v1(54.36,33.34) 57.76,33.34 57.83,33.26 v1(58.48,33.26)
LED_ST: length 58.7
  TOP w0.254: U14.31 52.98,43 52.46,42.48 52.46,36.13 53.73,34.86 56.02,34.86 57.17,33.7 U19.12 57.17,28.4 v1(57.03,28.26) ; v1(52.46,33.84) 51.44,33.84 50.94,33.34 28.93,33.34 28.68,33.08 U18.12
  BOTTOM w0.254: v1(57.03,28.26) 57.03,31.56 56.27,32.32 52.71,32.32 52.46,32.57 v1(52.46,33.84)
NRST: length 22.3
  TOP w0.254: U14.7 67.7,43.5 70.49,46.29 75.83,46.29 76.34,45.78 76.34,45.32 76.35,45.3 SW01.1 77.97,44.15 78.37,43.75 78.37,38.92 78.54,38.75 C23.1
OSC_IN: length 12.7
  TOP w0.254: Y01.3 72.64,40.19 72.64,39.37 72.39,39.12 71.63,39.12 71.2,38.69 C22.1 71.1,38.1 70.36,38.1 69.85,38.61 69.85,41.91 69.26,42.5 U14.5
OSC_OUT: length 7.9
  TOP w0.254: U14.6 70.75,43 Y01.1 71.15,43.55 71.2,43.6 C16.1
PUMP1_FAIL: length 4.4
  BOTTOM w0.254: J01.8 R105.2
PUMP1_START: length 4.4
  BOTTOM w0.254: J01.6 R103.2
PUMP1_STOP: length 4.4
  BOTTOM w0.254: J01.7 R104.2
PUMP2_FAIL: length 4.4
  BOTTOM w0.254: J01.11 R108.2
PUMP2_START: length 4.4
  BOTTOM w0.254: J01.9 R106.2
PUMP2_STOP: length 4.4
  BOTTOM w0.254: J01.10 R107.2
PUMP3_START: length 4.4
  BOTTOM w0.254: J01.12 R109.2
PUMP3_STOP: length 4.4
  BOTTOM w0.254: J01.13 R110.2
RS485_RX_LED: length 35.5
  TOP w0.254: R95.1 73.35,20.7 73.54,20.89 74.3,20.89 75.07,21.65 75.07,26.73 74.56,27.24 68.21,27.24 67.45,26.48 61.6,26.48 60.6,27.48 U14.41
RS485_TX_LED: length 36.5
  TOP w0.254: U14.40 60.1,27.22 61.35,25.97 67.7,25.97 68.46,26.73 74.3,26.73 74.56,26.48 74.56,22.16 73.8,21.4 72.1,21.4 71.85,21.14 R94.1
RS485A: length 33
  TOP w0.508: R98.2 48.97,13.25 48.96,13.24 45.76,13.24 45.4,13.6 D25.2 44,14.55 R97.1 42.7,7.8 42.75,7.75 42.75,6.35 J04.6 44.35,6.85 45.25,7.75 53.25,7.75 54.37,6.63 54.37,4.77 J04.8
RS485B: length 66.2
  TOP w0.508: J04.5 39.35,2.45 38.84,1.94 ; D25.1 47.3,15.33 47.72,15.75 v1(48.5,15.75) ; 38.84,1.94 48.84,1.94 49.35,2.45 J04.7 ; 38.84,1.94 SW02.2 ; R99.2 57.5,11.25 56.5,10.25 v1(49.25,10.25)
  BOTTOM w0.508: 49.35,9.75 49.35,14.9 v1(48.5,15.75) ; 49.35,9.75 J04.7 ; 49.35,9.75 49.25,9.85 v1(49.25,10.25)
SWCLK: length 55
  TOP w0.254: R41.2 24.08,48.25 24.77,47.56 24.77,39.43 26.3,37.91 44.59,37.91 v1(45.6,38.92) ; v1(55.88,36.58) 57.91,36.58 58.6,37.26 U14.37
  BOTTOM w0.254: v1(55.88,36.58) 55.37,36.07 48.26,36.07 47.5,36.83 47.5,38.35 46.93,38.92 v1(45.6,38.92)
SWDIO: length 50.9
  TOP w0.254: v1(53.85,41.66) 54.5,41.66 54.66,41.5 U14.34 ; R44.2 23.55,46.75 24.27,46.04 24.27,38.92 25.79,37.4 45.35,37.4 46.87,38.92 v1(48.14,38.92)
  BOTTOM w0.254: v1(48.14,38.92) 53.4,38.92 53.85,39.37 v1(53.85,41.66)
USART_DE: length 25.4
  TOP w0.254: U20.2 66.49,27.24 66.23,26.99 65.47,26.99 65.22,27.24 U20.3 v1(65.22,29.98) ; U14.33 58.25,42 58.27,41.97 v1(60.84,41.97)
  BOTTOM w0.254: v1(65.22,29.98) 61.66,29.98 60.84,30.8 v1(60.84,41.97)
USART_RX: length 15.8
  TOP w0.254: U14.43 61.6,31.31 62.11,30.8 67.19,30.8 67.76,30.23 U20.1
USART_TX: length 12.5
  TOP w0.254: U20.4 63.95,29.98 63.64,30.29 61.86,30.29 61.1,31.05 U14.42
VREF: length 28.5
  TOP w0.254: TP03.1 112.21,43.12 U13.6 109.23,43.12 108.9,43.44 ; 108.9,43.44 108.9,41.01 108.59,40.7 101.48,40.7 100.35,41.83 R40.2 C14.1 R39.2 ; 108.9,43.44 108.9,44.06 109.23,44.39 U13.7
N189166: length 10.4
  TOP w0.508: U21.6 113.07,24.45 113.57,24.95 C36.1 114.35,24.85 115.45,23.75 L02.1 117.35,22.75 D24.2
N189308: length 2.3
  TOP w0.508: C36.2 113.48,26.55 112.98,27.05 U21.1
N189348: length 7.1
  TOP w0.508: R70.1 R71.1 ; R71.1 C30.2 ; R71.1 110.85,29.5 110.4,29.05 U21.3
N190496: length 6
  TOP w0.254: U21.4 109.35,24.45 109.1,24.7 109.1,26.3 108.85,26.55 R80.2 107.55,26.85 D11.2
N190785: length 2.7
  TOP w0.508: C39.1 R96.2
N193009: length 13.4
  TOP w0.254: U15.4 113.3,38.35 113.87,38.92 120.53,38.92 121.04,38.42 121.04,36.38 120.61,35.95 C26.1
N410005: length 21
  TOP w0.254: U14.9 67.94,44.5 70.24,46.8 79.64,46.8 80.05,46.39 L01.2 C17.1 C21.1
N444772: length 19.4
  TOP w0.254: R36.2 R37.2 98.85,56.45 99.36,56.96 101.99,56.96 102.5,56.45 102.5,46.54 103.39,45.66 U13.1
N444804: length 23.4
  TOP w0.254: R40.1 101.29,50.55 101.48,50.35 101.48,44 102.37,43.12 U13.3 107.45,43.12 108.09,43.75 108.09,46.29 108.75,46.95 R42.1
N444926: length 7.8
  BOTTOM w0.254: R112.1 R111.1 103.15,69.4 104.25,68.3 U12.2
N444930: length 23.6
  TOP w0.254: 113.28,51.37 116.23,51.37 116.85,50.75 R43.1 C15.1 ; 113.28,51.37 104.77,51.37 104.25,50.85 U12.4 ; 113.28,51.37 113.85,50.8 R42.2
  BOTTOM w0.254: U12.4 104.25,47.75 TP02.1
N444978: length 15.3
  TOP w0.254: R37.1 R38.2 101.7,53.95 101.99,53.66 101.99,45.02 102.62,44.39 U13.2
N445022: length 6.7
  TOP w0.254: U12.1 111.45,68.4 111.55,68.5 R13.1 R12.1
N446190: length 7.8
  TOP w0.254: U13.5 111.59,41.85 111.7,41.95 R48.2 R49.1 C18.1
N466592: length 2.6
  TOP w0.508: Q02.3 96.05,38.43 95.63,38.85 D05.1
N466694: length 8.2
  TOP w0.254: R50.2 R51.1 C20.2 97.35,37.21 97.67,36.89 97.7,36.89 97.8,36.8 Q02.1
N466940: length 5.7
  TOP w0.254: R50.1 94.35,43.48 94.62,43.75 96.9,43.75 97.15,44 Q01.3
N466944: length 4.4
  TOP w0.254: Q01.1 92.95,46.7 92.9,46.75 R45.2 R47.2
N526273: length 31
  TOP w0.254: U20.6 65.22,24.75 65.67,25.21 67.7,25.21 68.72,26.22 73.03,26.22 73.35,25.91 R82.2
  TOP w0.508: R98.1 54.7,14.88 55.32,15.5 64.6,15.5 65.22,16.12 U20.6
N526379: length 19.4
  TOP w0.254: U20.7 66.49,24.25 66.94,24.7 67.95,24.7 68.72,23.94 68.72,23.68 68.97,23.43 69.68,23.43 69.7,23.45 R81.1
  TOP w0.508: R99.1 65.49,13.25 66.49,14.25 U20.7
N537303: length 3.4
  TOP w0.254: U15.3 113.3,36.3 114.55,37.55 R59.1
N543383: length 5.8
  TOP w0.254: U11.4 93.1,56.55 92.85,56.3 R35.1 R34.2 C11.1
N543441: length 8.7
  TOP w0.254: v1(93.1,67.25) U11.1
  BOTTOM w0.254: R100.1 91.83,68.52 v1(93.1,67.25)
N546512: length 5.8
  TOP w0.254: C10.1 R32.2 R33.1 85.35,56.3 85.48,56.43 U10.4
N546526: length 8.7
  TOP w0.254: v1(85.48,67.25) U10.1
  BOTTOM w0.254: R101.1 84.21,68.52 v1(85.48,67.25)
N546951: length 5.7
  TOP w0.254: U09.4 77.86,56.31 77.85,56.3 R31.1 R30.2 C09.1
N546965: length 8.7
  TOP w0.254: v1(77.86,67.25) U09.1
  BOTTOM w0.254: R102.1 76.59,68.52 v1(77.86,67.25)
N548187: length 5.8
  TOP w0.254: U08.4 70.24,56.41 70.35,56.3 R29.1 R28.2 C08.1
N548207: length 5.8
  TOP w0.254: C07.1 R26.2 R27.1 62.85,56.37 62.62,56.6 U07.4
N548227: length 5.8
  TOP w0.254: C06.1 R24.2 R25.1 55.35,56.3 55,56.65 U06.4
N548241: length 8.7
  TOP w0.254: v1(70.24,67.25) U08.1
  BOTTOM w0.254: v1(70.24,67.25) 68.97,68.52 R103.1
N548283: length 8.7
  TOP w0.254: v1(62.62,67.25) U07.1
  BOTTOM w0.254: R104.1 61.35,68.52 v1(62.62,67.25)
N548325: length 8.7
  TOP w0.254: v1(55,67.25) U06.1
  BOTTOM w0.254: v1(55,67.25) 53.73,68.52 R105.1
N553345: length 5.9
  TOP w0.254: U05.4 47.38,57.01 47.85,56.54 R23.1 R22.2 C05.1
N553365: length 6.9
  TOP w0.254: R20.2 R21.1 ; R20.2 39.35,56.3 39.76,56.71 U04.4 ; R20.2 C04.1
N553385: length 6
  TOP w0.254: U03.4 32.14,56.44 31.35,55.65 R18.2 ; R18.2 R19.1 ; R18.2 C03.1
N553399: length 8.7
  TOP w0.254: v1(47.38,67.25) U05.1
  BOTTOM w0.254: R106.1 46.11,68.52 v1(47.38,67.25)
N553441: length 8.7
  TOP w0.254: v1(39.76,67.25) U04.1
  BOTTOM w0.254: R107.1 38.49,68.52 v1(39.76,67.25)
N553483: length 8.7
  TOP w0.254: v1(32.14,67.25) U03.1
  BOTTOM w0.254: v1(32.14,67.25) 30.87,68.52 R108.1
N554336: length 6
  TOP w0.254: R16.2 C02.1 ; R16.2 23.85,55.65 24.62,56.42 U02.4 ; R16.2 R17.1
N554356: length 5.8
  TOP w0.254: R14.2 R15.1 ; R14.2 C01.1 ; R14.2 16.35,56.3 16.62,56.57 U01.4
N554370: length 8.7
  TOP w0.254: U02.1 24.62,66.51 24.62,66.51 v1(24.62,67.17)
  BOTTOM w0.254: R109.1 23.25,68.52 23.85,67.91 23.88,67.91 v1(24.62,67.17)
N554412: length 8.6
  TOP w0.254: U01.1 16.62,66.26 v1(16.62,67.25)
  BOTTOM w0.254: R110.1 15.63,68.24 v1(16.62,67.25)
N556627: length 2.6
  TOP w0.508: D12.1 95.63,24.85 96.05,24.43 Q05.3
N556667: length 8.2
  TOP w0.254: Q05.1 97.8,22.8 97.67,22.92 97.67,22.92 97.35,23.24 R78.1 C35.2 R77.2
N556785: length 5.6
  TOP w0.254: Q03.3 97.15,30.03 96.9,29.78 94.83,29.78 94.35,29.3 R77.1
N556865: length 4.4
  TOP w0.254: Q03.1 92.95,32.7 92.9,32.75 R67.2 R72.2
N558367: length 8.1
  TOP w0.254: R64.2 15.77,34.75 15.08,34.06 U17.1
N558391: length 8.6
  TOP w0.254: R57.1 R61.2 19.3,36.25 18.92,35.88 15.71,35.88 15.08,36.5 U17.4
N558447: length 3.9
  TOP w0.254: U17.2 17.62,32.79 18.08,33.25 D07.1
N558752: length 8
  TOP w0.254: U16.1 3.08,33.99 3.84,34.75 R63.2
N558776: length 8.5
  TOP w0.254: U16.4 3.08,36.74 3.95,35.88 6.92,35.88 7.3,36.25 R60.2 R56.1
N558832: length 3.9
  TOP w0.254: D06.1 6.04,33.25 5.62,32.83 U16.2
N572741: length 5.9
  TOP w0.254: R84.2 18.31,17.45 17.92,17.84 17.92,20.38 17.51,20.79 D14.2
N572745: length 6.1
  TOP w0.254: R85.2 20.85,15.96 20.6,15.71 D14.3
N572749: length 5.9
  TOP w0.254: R86.2 25.93,17.45 25.54,17.84 25.54,20.38 25.13,20.79 D15.2
N572753: length 6
  TOP w0.254: R87.2 28.35,16.08 27.98,15.71 D15.3
N572757: length 6
  TOP w0.254: R88.2 33.16,17.45 32.9,17.7 32.9,20.38 32.49,20.79 D16.2
N572761: length 5.9
  TOP w0.254: D16.3 35.34,15.71 35.85,16.22 R89.2
N572801: length 2.1
  TOP w0.254: D03.2 48.55,41.68 R54.2
N572805: length 2.1
  TOP w0.254: D02.2 41.05,41.68 R53.2
N572923: length 33.7
  TOP w0.254: R54.1 50.15,40.1 50.94,39.31 50.94,36.38 49.41,34.86 27.57,34.86 26.72,34.02 26.72,30.25 U18.15
N572959: length 4.3
  TOP w0.254: U18.10 29.97,29.25 30.2,29.02 32.42,29.02 32.85,29.45 R75.2
N572963: length 47.9
  TOP w0.254: R53.1 42.65,40.06 43.03,39.69 49.67,39.69 50.43,38.92 50.43,36.64 49.16,35.37 26.55,35.37 25.28,34.1 25.28,24.59 25.62,24.25 U18.1
N573001: length 12
  TOP w0.254: U18.2 26.72,24.25 26.72,23.1 26.3,22.67 19.95,22.67 19.35,22.07 R84.1
N573039: length 10.9
  TOP w0.254: R85.1 20.85,21.65 21.36,22.16 26.55,22.16 27.38,22.98 U18.3
N573077: length 5.7
  TOP w0.254: R86.1 26.85,21.7 28.02,22.87 28.02,24.25 U18.4
N573107: length 5.3
  TOP w0.254: R87.1 28.35,22.43 28.68,22.76 U18.5
N573147: length 9.7
  TOP w0.254: R88.1 34.35,21.73 33.92,22.16 29.85,22.16 29.33,22.69 U18.6
N573179: length 10.7
  TOP w0.254: U18.7 29.97,23.25 29.98,23.24 29.98,22.92 30.23,22.67 35.44,22.67 35.85,22.26 R89.1
N574717: length 3.2
  TOP w0.254: D17.2 40.73,16.98 41.2,17.45 R90.2
N574721: length 3.2
  TOP w0.254: D18.2 44.47,16.98 44,17.45 R91.2
N574829: length 23.4
  TOP w0.254: R90.1 41.85,21.2 42.81,22.16 53.48,22.16 53.98,22.67 53.98,28.26 54.24,28.51 54.97,28.51 55.23,28.76 U19.15
N574865: length 11.3
  TOP w0.254: R76.2 52.46,27.84 v1(52.46,26.48) ; U19.10 v1(58.47,26.56)
  BOTTOM w0.254: v1(52.46,26.48) 57.74,26.48 57.82,26.56 v1(58.47,26.56)
N574869: length 15.7
  TOP w0.254: R91.1 43.35,19.8 43.32,19.84 43.32,20.89 44.08,21.65 53.98,21.65 54.57,22.24 U19.1
N574907: length 6.3
  TOP w0.254: U19.2 55.23,22.19 55.76,21.65 56.52,21.65 56.85,21.33 R92.1
N574927: length 3.2
  TOP w0.254: D19.2 55.73,16.98 56.2,17.45 R92.2
N574945: length 7.1
  TOP w0.254: R93.1 58.35,19.8 58.3,19.85 58.3,21.91 57.79,22.41 56.27,22.41 55.87,22.81 U19.3
N574965: length 3.2
  TOP w0.254: R93.2 59,17.45 59.47,16.98 D20.2
N575311: length 29
  TOP w0.254: U19.14 55.87,31.95 55.51,32.32 30.88,32.32 30.63,32.07 U18.9
N587939: length 28
  TOP w0.508: R97.2 v1(36,13.25)
  BOTTOM w0.508: v1(36,13.25) 36,10.12 35.44,9.56 SW02.1
N591951: length 13.6
  TOP w0.254: F01.1 115.8,77.8 115.78,77.79 108.59,77.79 107.07,79.31 J01.1
N594430: length 59.2
  TOP w0.254: R62.1 74.18,36.25 74.81,35.62 74.81,34.61 75.07,34.35 79.64,34.35 81.16,32.83 81.16,15.81 v1(81.92,15.05)
  BOTTOM w0.254: v1(81.92,15.05) 83.7,13.27 107.7,13.27 108.66,12.32 SW03.4
N594480: length 55.6
  TOP w0.254: R65.1 73.65,34.75 74.3,34.1 74.3,33.84 74.56,33.59 79.13,33.59 80.4,32.32 80.4,14.79 v1(81.16,14.03)
  BOTTOM w0.254: SW03.3 106.12,11.68 105.16,12.64 82.56,12.64 v1(81.16,14.03)
N594586: length 52.2
  TOP w0.254: R66.1 73.4,33.25 74.08,32.57 78.88,32.57 79.89,31.56 79.89,13.52 v1(80.4,13.02)
  BOTTOM w0.254: SW03.2 103.58,11.05 102.62,12 81.42,12 v1(80.4,13.02)
N594620: length 7.2
  TOP w0.254: R44.1 13.39,46.75 12.84,47.31 12.84,48.83 12.17,49.5 J03.3
N594654: length 14
  TOP w0.254: R46.1 12.86,45.25 12.07,46.04 12.07,47.81 11.57,48.32 8.27,48.32 7.09,49.5 J02.3
N594672: length 49.1
  TOP w0.254: v1(79.76,12) 79.3,12.46 79.3,30.88 78.43,31.75 R69.1
  BOTTOM w0.254: v1(79.76,12) 80.4,11.37 100.49,11.37 101.04,10.81 SW03.1
N594682: length 14.2
  TOP w0.254: J02.4 J03.4 12.97,52 13.6,51.37 13.6,48.83 14.18,48.25 R41.1
N600007: length 2.1
  TOP w0.254: R52.2 33.55,41.68 D01.2
N600063: length 3.2
  TOP w0.254: D22.2 75.4,16.98 74.93,17.45 R95.2
N600117: length 3.2
  TOP w0.254: R94.2 70.27,17.45 69.8,16.98 D21.2
N601770: length 6.8
  TOP w0.254: Q04.3 42.8,24.45 42.35,24.9 LS01.2
N601826: length 4
  TOP w0.254: R73.2 R74.2 47.85,28.15 47.6,27.9 Q04.1
N618276: length 4.7
  TOP w0.254: R11.1 91.83,69.26 90.56,67.99 U11.2
N618412: length 4.7
  TOP w0.254: U10.2 82.94,68.01 84.21,69.28 R10.1
N618570: length 4.7
  TOP w0.254: R09.1 75.85,68.66 75.85,68.46 75.32,67.93 U09.2
N618702: length 4.7
  TOP w0.254: R08.1 68.96,69.4 67.7,68.14 U08.2
N618862: length 4.7
  TOP w0.254: U07.2 60.08,68.13 60.33,68.39 60.34,68.39 R07.1
N618996: length 4.7
  TOP w0.254: U06.2 52.46,68.06 52.89,68.49 52.89,68.56 R06.1
N619132: length 4.7
  TOP w0.254: U05.2 44.84,67.91 46.11,69.18 R05.1
N619280: length 4.7
  TOP w0.254: U04.2 37.22,67.6 38.49,68.87 R04.1
N619410: length 4.7
  TOP w0.254: U03.2 29.6,67.83 30.23,68.46 30.23,68.76 R03.1
N619552: length 4.6
  TOP w0.254: U02.2 22.08,67.33 23.25,68.5 R02.1
N619660: length 5.1
  TOP w0.254: U01.2 14.08,68.45 15.03,69.4 R01.1
N1899351: length 3.5
  TOP w0.508: F02.2 104,18.38 104.05,18.43 D13.1

## Copper pours and planes (outline as drawn; the poured copper is in the pictures)
GND on BOTTOM: 0.51,0.57 0.51,59.24 122.19,59.24 122.19,0.57
(no net) on TOP: 0.51,0.57 0.51,59.24 122.19,59.24 122.19,0.57

Small or netless copper shapes (teardrops, artwork), in the pictures only: 148 on TOP, 69 on BOTTOM
